# Altium PCB PCB Layout.PcbDoc
Units mm, origin at the board's own origin, x right, y up, seen from the top; angles counter-clockwise.
Board outline 30 x 30 mm, 2 copper layers (Top Layer, Bottom Layer), stack 0.776 mm thick; 23 components, 19 nets, 85 pads, 44 vias.
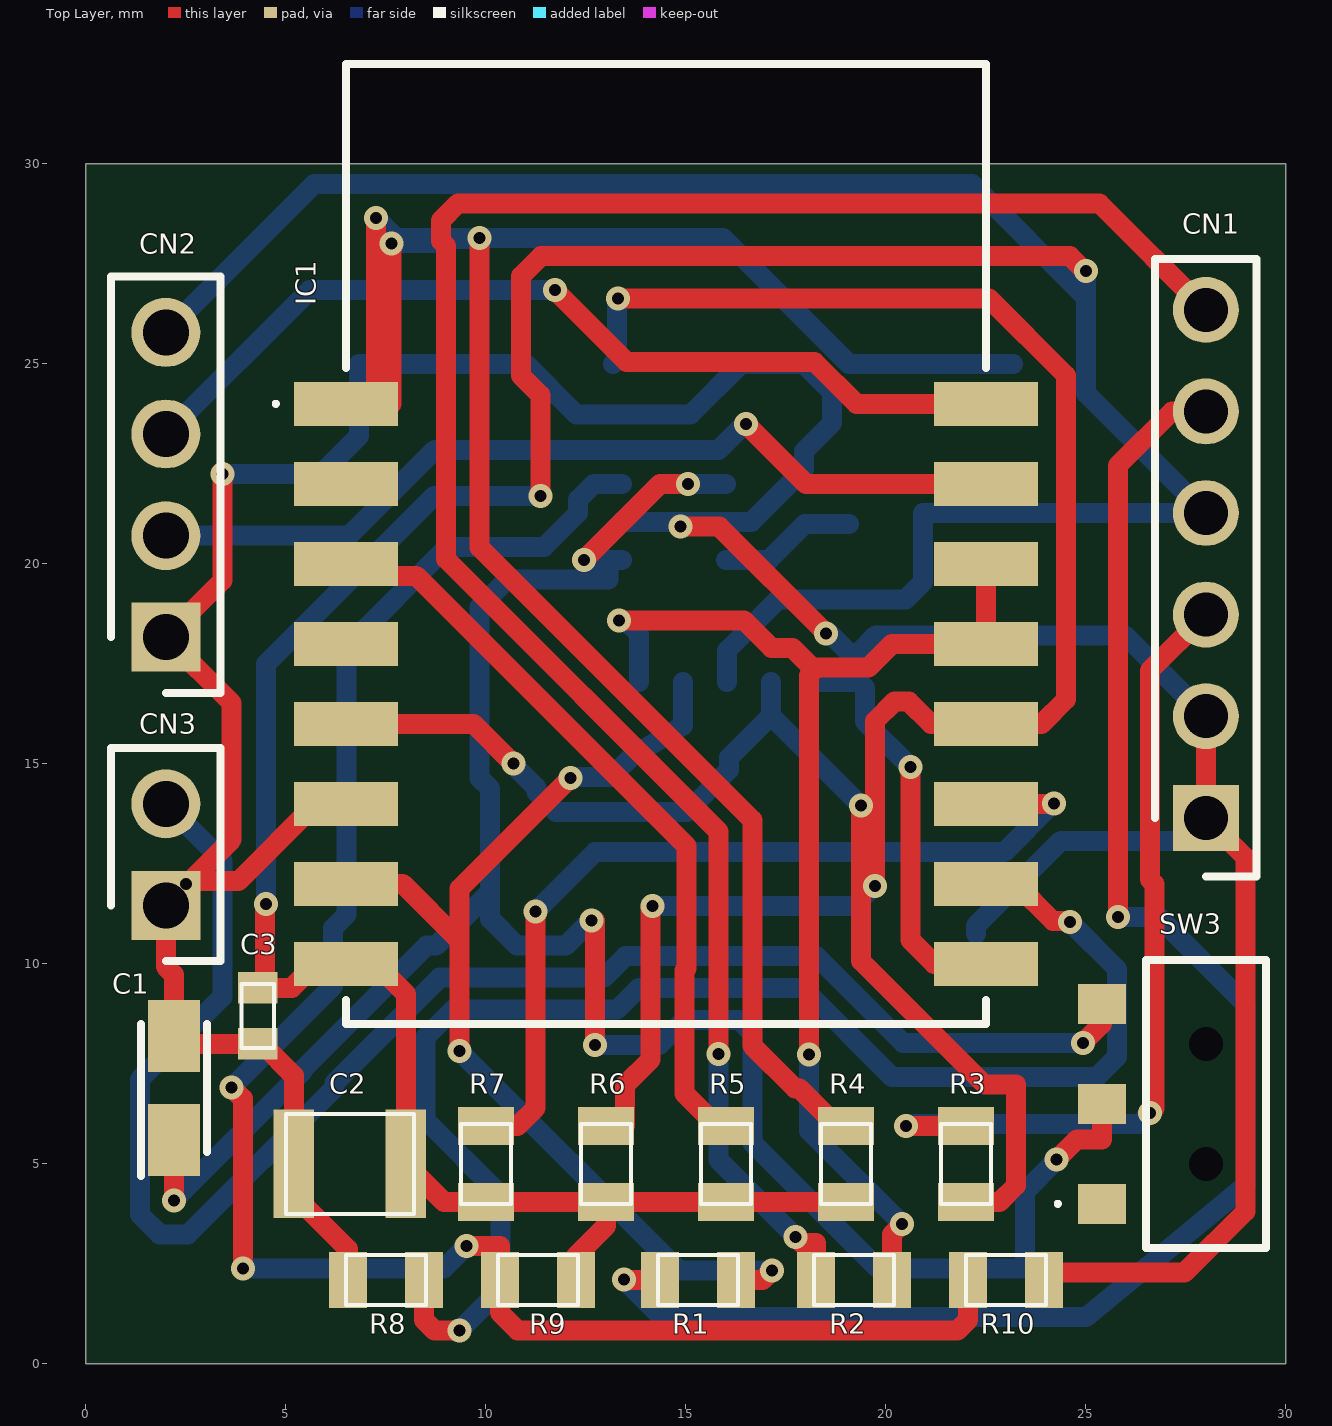
[diagram p0: Top Layer view]
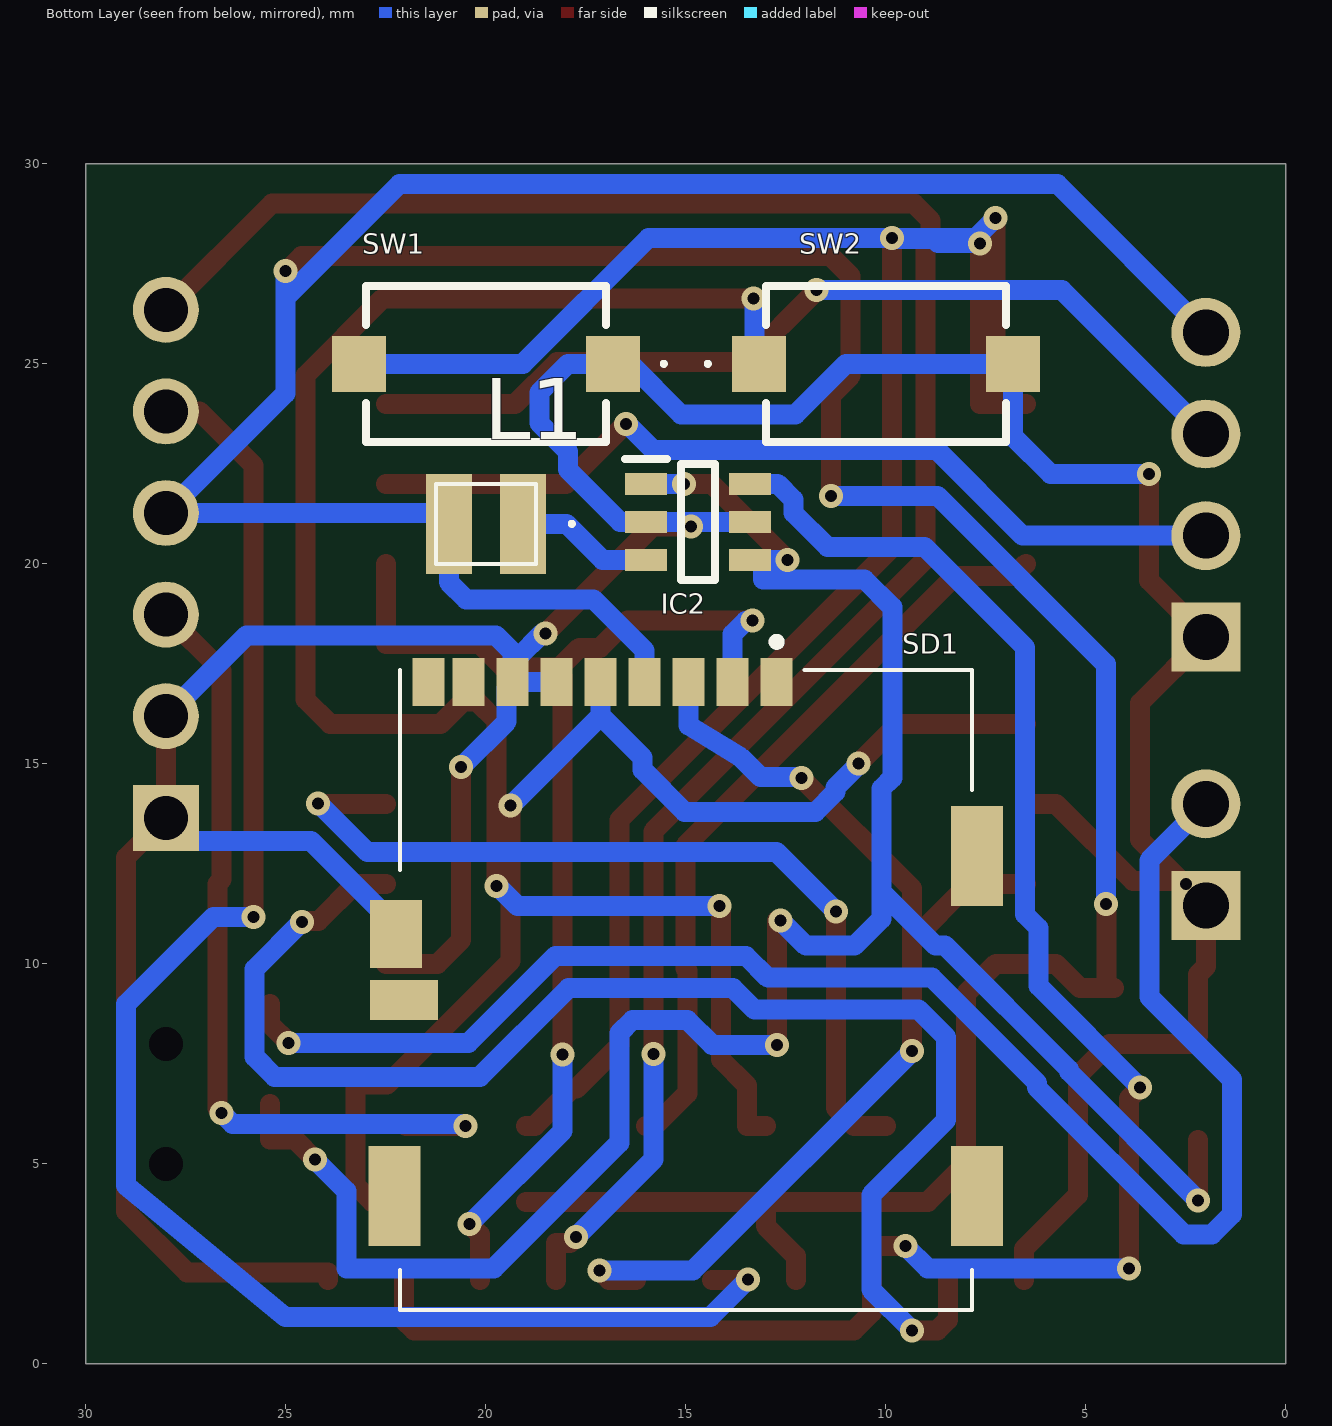
[diagram p1: Bottom Layer view, seen from below]
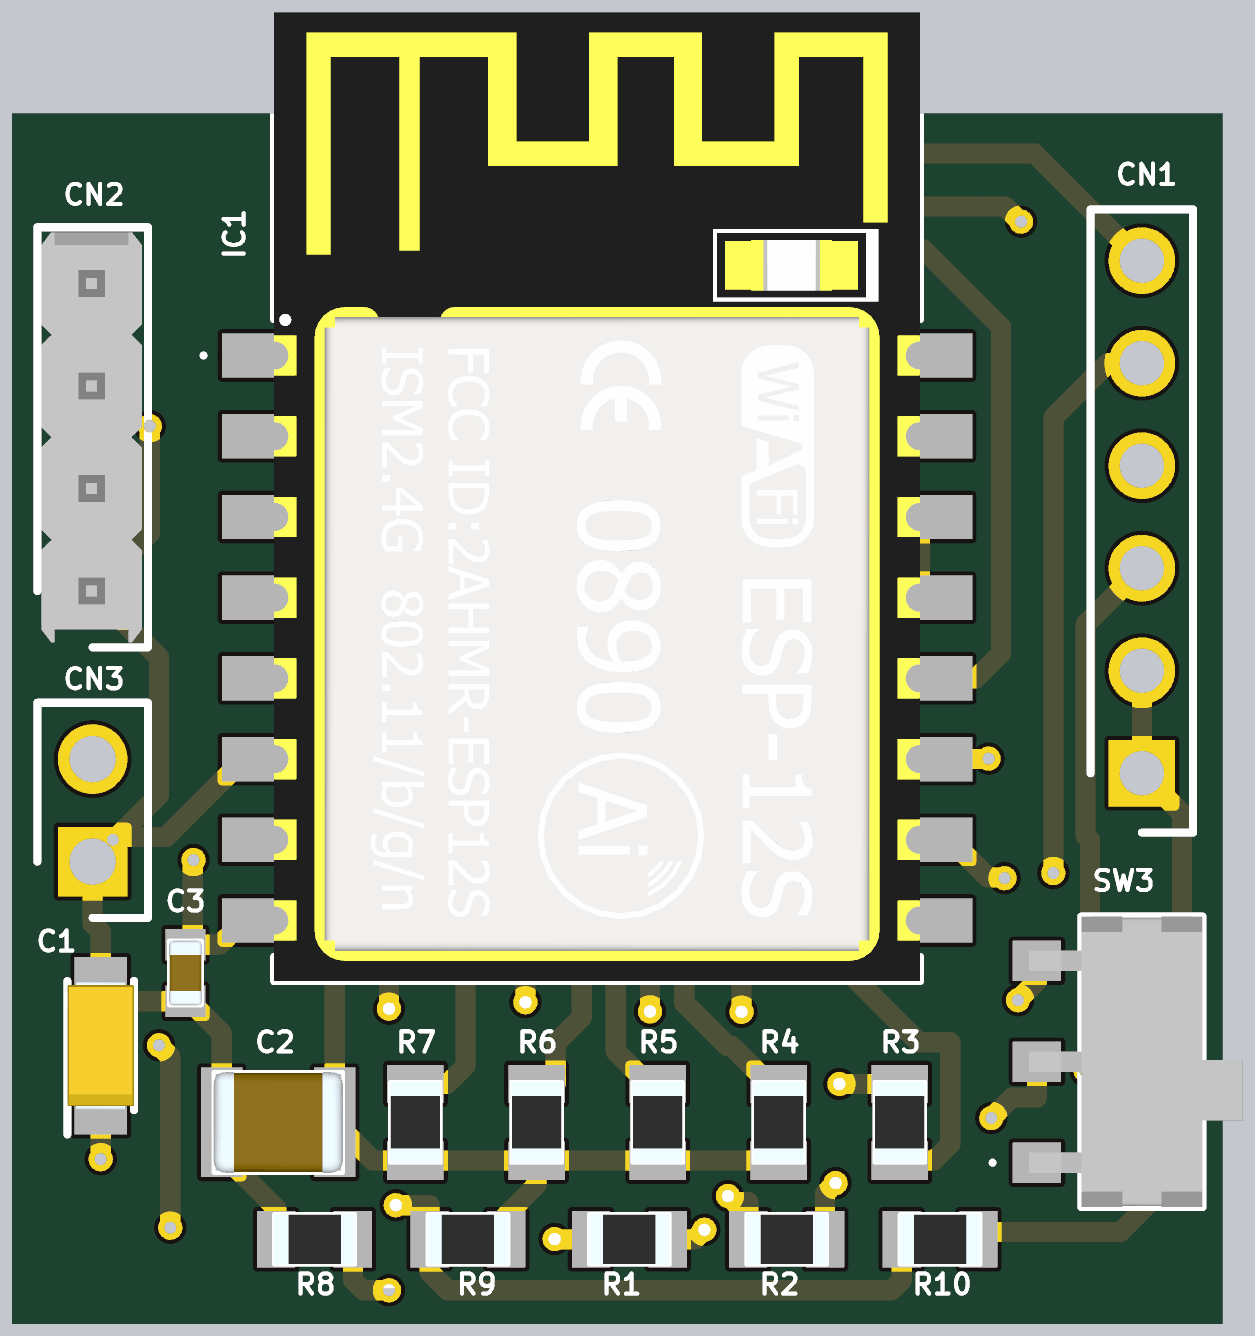
[diagram p2: 3D render of the assembled board from above, using the file's embedded part models]
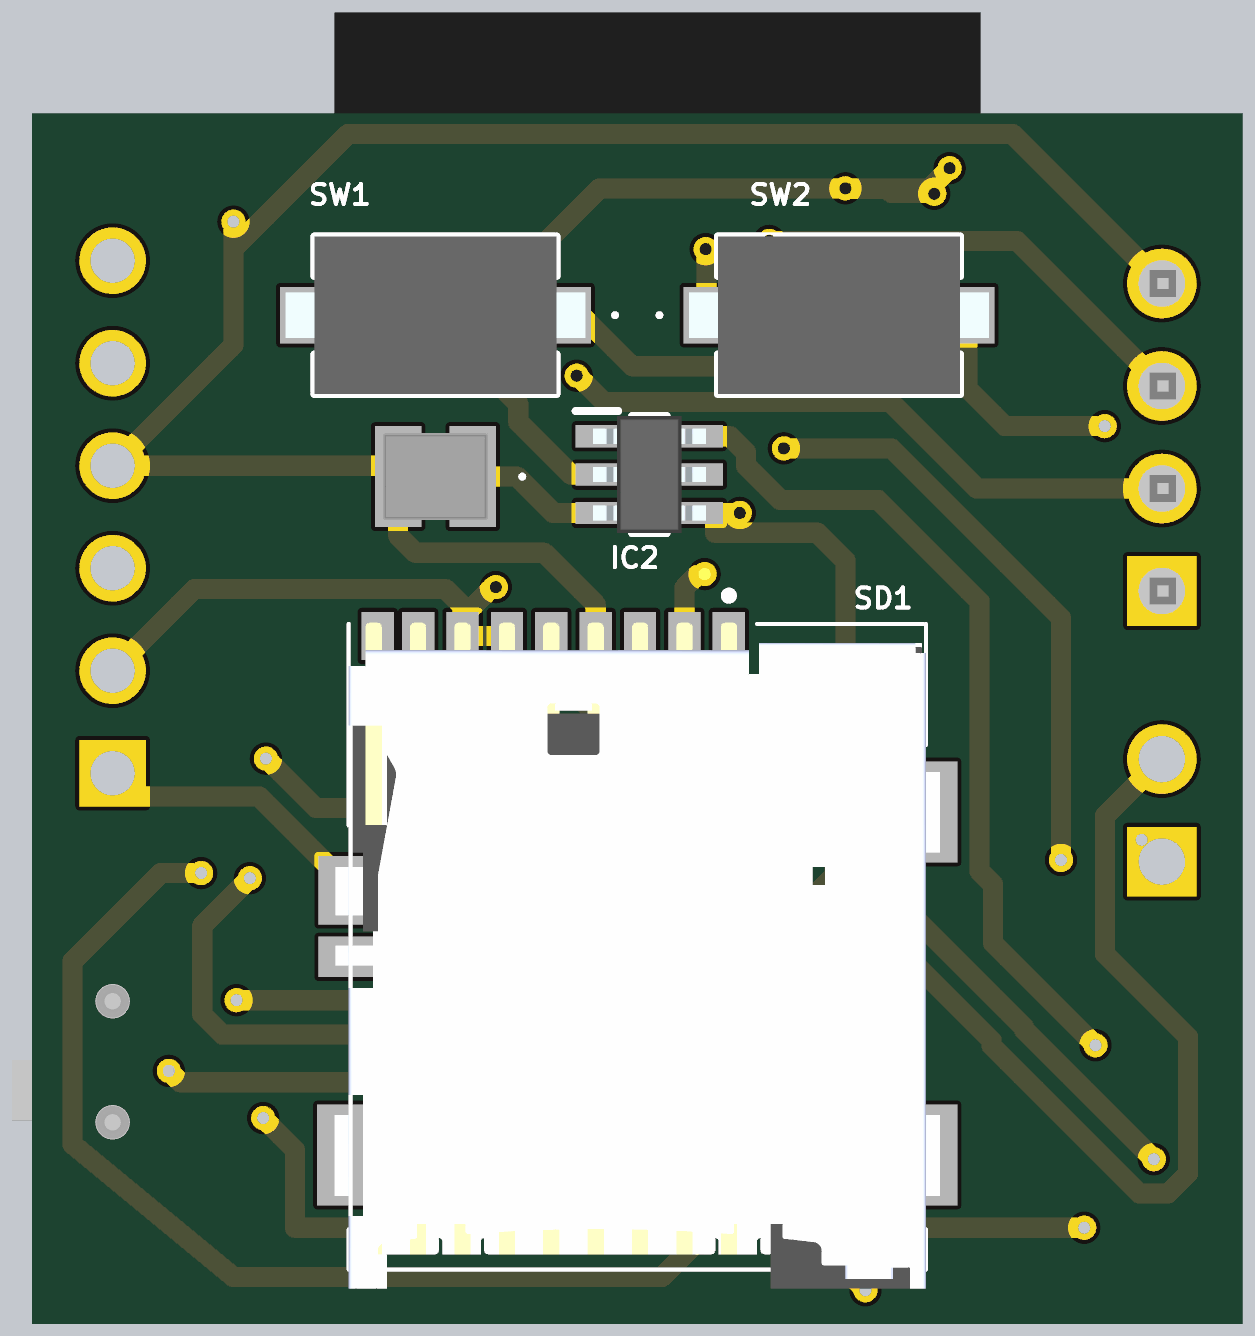
[diagram p3: 3D render of the assembled board from below, using the file's embedded part models]

## Layer stack, top to bottom
Top Solder: solder mask 0.025, Solder Resist, Dk 3.5
Top Layer: signal copper 0.036
Dielectric 1: core 0.704, Core-009, Dk 4.5
Bottom Layer: signal copper 0.036
Bottom Solder: solder mask 0.025, Solder Resist, Dk 3.5

## Board outline
0,0 30,0 30,30 0,30

## Design rules (kind name [scope] priority, off if disabled: settings)
Clearance [All] p1: gap=0.3 ignorepadtopadclearanceinfootprint=FALSE
PolygonConnect [All] p1: connectstyle=Relief reliefconductorwidth=0.254 reliefentries=4 polygonreliefangle="90 Angle" airgapwidth=0.254
RoutingVias [All] p1: holewidth=0.3 width=0.6 viastyle="Through Hole" minholewidth=0.3 minwidth=0.6 maxholewidth=0.3 maxwidth=0.6
SolderMaskExpansion [All] p1: expansion=0.102 istentingtop=FALSE
Width [All] p1: maxlimit=1 minlimit=0.3 preferedwidth=0.5
30 further rules are at their usual default settings.

## Components (designator, comment, footprint, x,y, rotation, side; value= is the part's Value field where it differs from the comment)
C1 "10uF" TPSA106K006R1500 2.2,6.9 r90 top
C2 "47uF" 1210 6.6,5 r0 top
C3 "0.1uF" 0603 4.3,8.7 r90 top
CN1 "Header Male 1x6" 1x6 28,20 r90 top
CN2 "Header Male 1x4" 1x4 2,22 r90 top
CN3 "Header Male 1x2" 1x2 2,12.73 r90 top
IC1 "ESP-12S" ESP-12S 14.5,20.5 r0 top
IC2 "SY8009BABC" SY8009BABC 14.7,21.05 r180 bottom
L1 "SRN2510BTA-2R2M" "2.5 mm x 2 mm x 0.9 mm" 20,21 r0 bottom
R1 "1K" 0805 15.3,2.1 r180 top
R2 "1K" 0805 19.2,2.1 r180 top
R3 "1K" 0805 22,5 r90 top
R4 "10K" 0805 19,5 r90 top
R5 "10K" 0805 16,5 r90 top
R6 "10K" 0805 13,5 r90 top
R7 "10K" 0805 10,5 r90 top
R8 "10K" 0805 7.5,2.1 r0 top
R9 "45.3K" 0805 11.3,2.1 r0 top
R10 "10K" 0805 23,2.1 r180 top
SD1 "045138008100858+" 045138008100858+ 15,9.5 r0 bottom
SW1 "434113025826" 434113025826 20,25 r0 bottom
SW2 "434113025826" 434113025826 10,25 r180 bottom
SW3 "AYZ0102AURLC" AYZ0102AURLC 27.95,6.5 r90 top

## Footprints (in the part's own frame and the unit in brackets; to place one, negate y for a bottom-side part, rotate by r counter-clockwise, add the part's x,y. Pads: shape width x height; smd on the part's side, far side on the other; paste and mask are expansions set on the pad)
1x2 [mm]
  rect 1.725x1.725 hole 1.15: 1(-1.27,0)
  round 1.725 hole 1.15: 2(1.27,0)
  silkscreen extent -2.66,-1.37 2.67,1.37
1x4 [mm]
  rect 1.725x1.725 hole 1.15: 1(-3.835,0)
  round 1.725 hole 1.15: 2(-1.295,0) 3(1.245,0) 4(3.785,0)
  silkscreen extent -5.23,-1.37 5.18,1.37, body extent -5.11,-1.22 5.05,1.27, height 9.59
1x6 [mm]
  rect 1.65x1.65 hole 1.1: 1(-6.35,0)
  round 1.65 hole 1.1: 2(-3.81,0) 3(-1.27,0) 4(1.27,0) 5(3.81,0) 6(6.35,0)
  silkscreen extent -7.82,-1.27 7.62,1.27
"2.5 mm x 2 mm x 0.9 mm" [mm]
  rect 1.15x2.5 smd: 1(-0.925,0) 2(0.925,0)
  silkscreen extent -2.2,-1 1.25,1, body extent -1.3,-1.07 1.3,1.08, height 0.96
0603 [mm]
  rect 0.78x0.99 smd: 1(-0.7,0) 2(0.7,0)
  silkscreen extent -0.8,-0.4 0.8,0.41, body extent -0.8,-0.41 0.8,0.41, height 0.9
0805 [mm]
  rect 0.95x1.4 smd: 1(-0.95,0) 2(0.95,0)
  silkscreen extent -1,-0.63 1,0.63, body extent -1,-0.63 1,0.63, height 0.6
1210 [mm]
  rect 1.02x2.72 smd: 1(-1.4,0) 2(1.4,0)
  silkscreen extent -1.6,-1.25 1.6,1.25, body extent -1.6,-1.25 1.6,1.25, height 2.79
434113025826 [mm]
  rect 1.35x1.4 smd: 1(-3.175,0) 2(3.175,0)
  silkscreen extent -4.5,-1.95 3,1.95, body extent -3.72,-1.95 3.71,1.95, height 2.75
045138008100858+ [mm]
  rect 0.8x1.2 smd: 1(-2.27,-7.55) 2(-1.17,-7.55) 3(-0.07,-7.55) 4(1.03,-7.55) 5(2.13,-7.55) 6(3.23,-7.55) 7(4.33,-7.55) 8(5.43,-7.55) 9(6.43,-7.55)
  rect 1.3x2.5 smd: 10(-7.28,-3.19) 11(-7.28,5.31) 12(7.28,5.31)
  rect 1.3x1.7 smd: 13(7.25,-1.25)
  rect 1.7x1 smd: CD1(7.05,0.4)
  silkscreen extent -7.15,-8.65 7.15,8.15, body extent -7.5,-7.88 7.5,8.62, height 1.65
AYZ0102AURLC [mm]
  rect 1x1.2 smd: 1(-2.5,2.55) 2(0,2.55) 3(2.5,2.55)
  round 0.425 hole 0.85 unplated: MH2(-1.5,-0.05) MH3(1.5,-0.05)
  silkscreen extent -3.6,-1.55 3.6,3.7, body extent -3.6,-2.54 3.6,2.75, height 1.51
ESP-12S [mm]
  rect 2.6x1.1 smd: 1(-8,3.5) 2(-8,1.5) 3(-8,-0.5) 4(-8,-2.5) 5(-8,-4.5) 6(-8,-6.5) 7(-8,-8.5) 8(-8,-10.5) 9(8,-10.5) 10(8,-8.5) 11(8,-6.5) 12(8,-4.5) 13(8,-2.5) 14(8,-0.5) 15(8,1.5) 16(8,3.5)
  silkscreen extent -9.8,-12 8,12, body extent -8,-12 8,12, height 3.11
SY8009BABC [mm]
  rect 1.05x0.55 smd: 1(-1.3,0.95) 2(-1.3,0) 3(-1.3,-0.95) 4(1.3,-0.95) 5(1.3,0) 6(1.3,0.95)
  silkscreen extent -1.82,-1.45 0.42,1.58, body extent -1.4,-1.45 1.4,1.45, height 1
TPSA106K006R1500 [mm]
  rect 1.8x1.3 smd: 1(-1.3,0) 2(1.3,0)
  silkscreen extent -2.2,-0.82 1.6,0.82, body extent -1.6,-0.82 1.6,0.82, height 1.8

## Part data
C1: library part TPSA106K006R1500, "Cap Tant Solid 10uF 6.3V A CASE 10% (3.2 X 1.6 X 1.6mm) SMD 3216-18 1.5 Ohm 125AHA T/R", Manufacturer="Kyocera AVX", Supplier Part Number 1=478-2388-1-ND, Category="Tantalum Capacitors", ComponentLink1Description=https://datasheet.ciiva.com/11793/0900766b80066cb4-11793070.pdf?src-supplier=Rs, ComponentLink1URL=https://datasheet.ciiva.com/11793/0900766b80066cb4-11793070.pdf?src-supplier=Rs, ComponentLink2Description=https://datasheet.ciiva.com/19458/2022203-19458874.pdf?src-supplier=Jameco, ComponentLink2URL=https://datasheet.ciiva.com/19458/2022203-19458874.pdf?src-supplier=Jameco, ComponentLink3Description=https://datasheet.ciiva.com/26341/806582-da-01-en-smd-tantal10uf-6-3v-10-1-500r-2000st-26341833.pdf?src-supplier=Conrad, ComponentLink3URL=https://datasheet.ciiva.com/26341/806582-da-01-en-smd-tantal10uf-6-3v-10-1-500r-2000st-26341833.pdf?src-supplier=Conrad, ComponentLink4Description=https://datasheet.ciiva.com/12883/tps-23028-12883222.pdf?src-supplier=Mouser, ComponentLink4URL=https://datasheet.ciiva.com/12883/tps-23028-12883222.pdf?src-supplier=Mouser, ComponentLink5Description=https://datasheet.ciiva.com/14594/70001047-14594397.pdf?src-supplier=Allied+Electronics, ComponentLink5URL=https://datasheet.ciiva.com/14594/70001047-14594397.pdf?src-supplier=Allied+Electronics, ComponentLink6Description=https://datasheet.ciiva.com/22706/1441576-22706887.pdf?src-supplier=Element14, ComponentLink6URL=https://datasheet.ciiva.com/22706/1441576-22706887.pdf?src-supplier=Element14, ComponentLink7Description=https://datasheet.ciiva.com/7730/1441576-7730861.pdf?src-supplier=Element14, ComponentLink7URL=https://datasheet.ciiva.com/7730/1441576-7730861.pdf?src-supplier=Element14, ComponentLink8Description=https://datasheet.ciiva.com/7730/1680477-7730862.pdf?src-supplier=Element14, ComponentLink8URL=https://datasheet.ciiva.com/7730/1680477-7730862.pdf?src-supplier=Element14, ComponentLink9Description=https://datasheet.ciiva.com/3004/tps-3004580.pdf?src-supplier=Avnet, ComponentLink9URL=https://datasheet.ciiva.com/3004/tps-3004580.pdf?src-supplier=Avnet, ComponentLink10Description=https://datasheet.ciiva.com/263/tps-263896.pdf?src-supplier=Digikey, ComponentLink10URL=https://datasheet.ciiva.com/263/tps-263896.pdf?src-supplier=Digikey, ComponentLink11Description=https://datasheet.ciiva.com/263/tps-263897.pdf?src-supplier=Digikey, ComponentLink11URL=https://datasheet.ciiva.com/263/tps-263897.pdf?src-supplier=Digikey, ComponentLink12Description=https://datasheet.ciiva.com/263/tps-263898.pdf?src-supplier=Digikey, ComponentLink12URL=https://datasheet.ciiva.com/263/tps-263898.pdf?src-supplier=Digikey, ComponentLink13Description=https://datasheet.ciiva.com/16380/tps-16380155.pdf?src-supplier=Future+Electronics, ComponentLink13URL=https://datasheet.ciiva.com/16380/tps-16380155.pdf?src-supplier=Future+Electronics, Life (Hours)=1000Hour, Manufacturer Part Number=TPSA106K006R1500, Pricing 1="1=0.5, 10=0.333, 50=0.2648, 100=0.2187, 500=0.17084, 1000=0.14521 (USD)", RoHS=Yes, Stock 1=29007, Supplier 1=Digikey
C2: library part 12103D476MAT2A, "Ceramic Capacitor, Multilayer, Ceramic, 25V, 20% +Tol, 20% -Tol, X5R, 15% TC, 47uF, Surface Mount, 1210", Case/Package=351Case, Dielectric=1537DielectricType, Manufacturer="Kyocera AVX", Max Operating Temperature=85°C, Min Operating Temperature=-55°C, Supplier Part Number 1=581-12103D476MAT2A, Tolerance=20%, Voltage Rating=25V, Capacitance=47uF, Category="Ceramic Capacitors", Height=2.79mm, Manufacturer Part Number=12103D476MAT2A, Material=4241ConductorMaterial, Pricing 1="1=2.75, 10=2.12, 50=1.94, 100=1.61, 1000=1.09, 10000=1.04 (USD)", RoHS=Yes, RoHS Compliant=Yes, Stock 1=27598, Supplier 1=Mouser, Voltage Rating (DC)=25V
C3: library part 06035C104K4T4A, "Multilayer Ceramic Capacitor, 0.1 uF, 50 V, ± 10%, X7R, 0603 [1608 Metric]", Capacitance=100nF, Case Code (Imperial)=0603, Case Code (Metric)=1608, Manufacturer="Kyocera AVX", Max Operating Temperature=125°C, Min Operating Temperature=-55°C, Package Quantity=10000, Ratings=AEC-Q200, Supplier Part Number 1=478-KAM15AR71H104KMCT-ND, Tolerance=10%, Voltage Rating=50V, Case/Package=0603, Category="Ceramic Capacitors", ComponentLink1Description=https://datasheet.ciiva.com/13197/cx7r-13197961.pdf?src-supplier=Mouser, ComponentLink1URL=https://datasheet.ciiva.com/13197/cx7r-13197961.pdf?src-supplier=Mouser, Lead Free=5697LeadFree, Length=0.063inch, Manufacturer Part Number=06035C104K4T4A, Mount="Surface Mount", Packaging="Tape and Reel", Pricing 1="1=0.1, 10=0.065, 50=0.037, 100=0.0287, 500=0.02164, 1000=0.017, 2500=0.01545, 5000=0.01421 (USD)", RoHS=Yes, RoHS Compliant=Yes, Series=-, Stock 1=15963, Supplier 1=Digikey, Termination=SMD/SMT, Thickness=0.035inch, Voltage Rating (DC)=50V, Width=0.032inch
CN1: "1x6"
CN2: "1x4"
CN3: "1x2"
IC1: "Wifi Module, 2.484Ghz, 9 I/o Port Rohs Compliant: Yes", Current - Transmitting=71mA, Frequency=2.484GHz, Manufacturer="RF Solutions", Max Operating Temperature=85°C, Max Supply Voltage=3.6V, Min Operating Temperature=-20°C, Min Supply Voltage=3V, Nominal Supply Current=300mA, Supplier Part Number 1=ESP-12SRF-ND, Bandwidth=72MHz, Category="RF Receivers, Transceivers", ComponentLink1Description=http://www.farnell.com/datasheets/2575856.pdf?src-supplier=Farnell, ComponentLink1URL=http://www.farnell.com/datasheets/2575856.pdf?src-supplier=Farnell, ComponentLink2Description=https://www.rfsolutions.co.uk/downloads/1513856197DS-ESP-12S.pdf?src-supplier=Digikey, ComponentLink2URL=https://www.rfsolutions.co.uk/downloads/1513856197DS-ESP-12S.pdf?src-supplier=Digikey, Data Rate=54Mbps, Interface=I2C,SPI,UART, Manufacturer Part Number=ESP-12S, Max Frequency=2.484GHz, Number of GPIO=9NUMBER, Pricing 1="1=10.3, 10=9.444, 25=8.5848, 100=7.7265, 250=7.08264, 500=6.43876, 1000=5.79488 (USD)", Reach SVHC Compliant=4186SVHC, RoHS=No, Sensitivity=-90dBm, Stock 1=59, Supplier 1=Digikey
IC2: "Step-down type SOT-23-6 DC-DC Converters ROHS"
L1: "Power Inductors - SMD Ind,2x2.5x0.9mm,2.2uH+/-20%,2A,shd", Manufacturer=Bourns, Supplier Part Number 1=118-SRN2510BTA-2R2MTR-ND, Manufacturer Part Number=SRN2510BTA-2R2M, Pricing 1="3000=0.15675 (USD)", RoHS=No, Supplier 1=DigiKey
R1 R2 R3: library part RC0805FR-071KL, "SMD Chip Resistor, 1 kOhm, ± 1%, 125 mW, 0805 [2012 Metric], Thick Film, General Purpose", Case Code (Imperial)=0805, Case Code (Metric)=2012, Manufacturer=Yageo, Max Operating Temperature=155°C, Max Power Dissipation=125mW, Min Operating Temperature=-55°C, Package Quantity=1, Resistance=1kR, Resistance Tolerance=1%, Resistor Type="Thick Film", Supplier Part Number 1=311-1.00KCRCT-ND, Temperature Coefficient=100ppm/°C, Voltage Rating=150V, Case/Package=0805, Category="Chip SMD Resistors", ComponentLink1Description=https://datasheet.ciiva.com/7941/1686128-7941719.pdf?src-supplier=Element14, ComponentLink1URL=https://datasheet.ciiva.com/7941/1686128-7941719.pdf?src-supplier=Element14, ComponentLink2Description=https://datasheet.ciiva.com/46385/444164-46385020.pdf?src-supplier=Element14, ComponentLink2URL=https://datasheet.ciiva.com/46385/444164-46385020.pdf?src-supplier=Element14, ComponentLink3Description=https://datasheet.ciiva.com/2456/pyu-r-int-thick-7-2456976.pdf?src-supplier=Digikey, ComponentLink3URL=https://datasheet.ciiva.com/2456/pyu-r-int-thick-7-2456976.pdf?src-supplier=Digikey, ComponentLink4Description=https://datasheet.ciiva.com/2456/pyu-r-int-thick-7-2456977.pdf?src-supplier=Digikey, ComponentLink4URL=https://datasheet.ciiva.com/2456/pyu-r-int-thick-7-2456977.pdf?src-supplier=Digikey, ComponentLink5Description=https://datasheet.ciiva.com/2456/pyu-r-int-thick-7-2456975.pdf?src-supplier=Digikey, ComponentLink5URL=https://datasheet.ciiva.com/2456/pyu-r-int-thick-7-2456975.pdf?src-supplier=Digikey, ComponentLink6Description=https://datasheet.ciiva.com/16850/rc0805-16850409.pdf?src-supplier=Future+Electronics, ComponentLink6URL=https://datasheet.ciiva.com/16850/rc0805-16850409.pdf?src-supplier=Future+Electronics, Construction=Rectangular, Depth=1.25mm, Features="Moisture Resistant", Height=0.024inch, Lead Free=5697LeadFree, Length=0.079inch, Manufacturer Part Number=RC0805FR-071KL, Military Standard=Not, Number of Pins=2, Number of Terminations=2, Packaging="Tape and Reel", Power Rating=125mW, Pricing 1="1=0.1, 10=0.025, 50=0.016, 100=0.0133, 500=0.00912, 1000=0.00787 (USD)", Reach SVHC Compliant=No, RoHS=Yes, RoHS Compliant=Yes, Series=RC, Size Code=0805, Stock 1=2558661, Supplier 1=Digikey, Termination=SMD/SMT, Tolerance=1%, Voltage Rating (AC)=150V, Voltage Rating (DC)=150V, Width=0.049inch
R4 R5 R6 R7 R8 R10: library part ERJUP6D1002V, "Anti-Sulfurated Thick Film Chip Resistors/ Anti-Surge Type, 10000½, 0.5%, 0.5W", Manufacturer=Panasonic, Supplier Part Number 1=3599201, ComponentLink1Description=http://datasheet.octopart.com/ERJUP6D1002V-Panasonic-datasheet-102570939.pdf?src-supplier=Newark, ComponentLink1URL=http://datasheet.octopart.com/ERJUP6D1002V-Panasonic-datasheet-102570939.pdf?src-supplier=Newark, ComponentLink2Description=http://datasheet.octopart.com/ERJUP6D1002V-Panasonic-datasheet-102570939.pdf?src-supplier=Farnell, ComponentLink2URL=http://datasheet.octopart.com/ERJUP6D1002V-Panasonic-datasheet-102570939.pdf?src-supplier=Farnell, Manufacturer Part Number=ERJUP6D1002V, Pricing 1="10=0.0972, 100=0.0701, 500=0.0583, 1000=0.0564, 2500=0.0517, 5000=0.0443, 25000=0.0413, 50000=0.0395 (EUR)", RoHS=No, Stock 1=2750, Supplier 1=Farnell
R9: library part RT0805DRE0745K3L, "High Precision-High Stability Chip Resistor Thin Film 0805 45.3kOhm 0.5% Paper T/R", Case/Package=0805, Manufacturer=Yageo, Max Operating Temperature=155°C, Max Power Dissipation=125mW, Min Operating Temperature=-55°C, Resistance=45.3kR, Supplier Part Number 1=13-RT0805DRE0745K3LCT-ND, Temperature Coefficient=50ppm/°C, Tolerance=0.5%, Voltage Rating (DC)=150V, Category="Chip SMD Resistors", ComponentLink1Description=https://datasheet.ciiva.com/2569/pyu-rt-1-to-0-05-rohs-l-5-2569500.pdf?src-supplier=Digikey, ComponentLink1URL=https://datasheet.ciiva.com/2569/pyu-rt-1-to-0-05-rohs-l-5-2569500.pdf?src-supplier=Digikey, Lead Free="Lead Free", Manufacturer Part Number=RT0805DRE0745K3L, Number of Terminations=2, Packaging="Tape and Reel", Pricing 1="1=0.1, 10=0.047, 50=0.0392, 100=0.0357, 500=0.02826, 1000=0.02534 (USD)", RoHS=Yes, RoHS Compliant=Yes, Series=RT, Stock 1=5000, Supplier 1=DigiKey
SD1: "T&r/Memory Card Rohs Compliant: Yes", Manufacturer=AVX, Supplier Part Number 1=581-045138008100858+, Category="Memory Connectors", ComponentLink1Description=https://datasheet.ciiva.com/6927/1631394-6927204.pdf?src-supplier=Newark, ComponentLink1URL=https://datasheet.ciiva.com/6927/1631394-6927204.pdf?src-supplier=Newark, Manufacturer Part Number=045138008100858+, Pricing 1="1=3.15, 10=2.87, 50=2.87, 100=2.53, 1000=2.27, 10000=2.27 (USD)", RoHS=Yes, Stock 1=26919, Supplier 1=Mouser
SW1 SW2: "Switch Tactile Spst-no 0.05A 12V", Manufacturer="Wurth Electronics", Supplier Part Number 1=732-7042-1-ND, Category="Tactile Switches", ComponentLink1Description=https://datasheet.ciiva.com/30466/0900766b8126b62d-30466725.pdf?src-supplier=Rs, ComponentLink1URL=https://datasheet.ciiva.com/30466/0900766b8126b62d-30466725.pdf?src-supplier=Rs, ComponentLink2Description=https://datasheet.ciiva.com/1701/434123025816-1701904.pdf?src-supplier=Newark, ComponentLink2URL=https://datasheet.ciiva.com/1701/434123025816-1701904.pdf?src-supplier=Newark, ComponentLink3Description=https://datasheet.ciiva.com/29123/711750-da-01-en-taster-434113025826-29123817.pdf?src-supplier=Conrad, ComponentLink3URL=https://datasheet.ciiva.com/29123/711750-da-01-en-taster-434113025826-29123817.pdf?src-supplier=Conrad, ComponentLink4Description=https://datasheet.ciiva.com/1532/434123025816-1532520.pdf?src-supplier=Element14, ComponentLink4URL=https://datasheet.ciiva.com/1532/434123025816-1532520.pdf?src-supplier=Element14, ComponentLink5Description=https://datasheet.ciiva.com/1633/434123025816-1633927.pdf?src-supplier=Farnell, ComponentLink5URL=https://datasheet.ciiva.com/1633/434123025816-1633927.pdf?src-supplier=Farnell, Manufacturer Part Number=434113025826, Pricing 1="1=0.58, 1500=0.461 (USD)", RoHS=Yes, Stock 1=4844, Supplier 1=Digikey
SW3: "AYZ Series 100 mA 12 V SPDT On-On Surface Mount Side Actuated Slide Switch", Manufacturer="ITT C&K", Supplier Part Number 1=2624403, Category=Uncategorized, Manufacturer Part Number=AYZ0102AURLC, Pricing 1="2=0.865, 10=0.83, 100=0.765, 500=0.635, 1000=0.59 (GBP)", RoHS=No, Stock 1=2968, Supplier 1=Rs

## Via types
v1: diameter 0.6, hole 0.3, Top Layer to Bottom Layer, 44 vias

## Nets (pads, with @x,y where several pads share a name; then routed paths per layer and width w, separated by ;. In a path a pad name is that pad's centre, name@x,y a point inside that pad or via, vN(x,y) a via of type N, cw(c..) or ccw(c..) an arc to the next point about the centre after c; other vN are vias at no path point)
+3V3: C2.2 C3.2 CN1.4 CN2.4 IC1.8 L1.2 R4.1 R5.1 R6.1 R7.1 R9.2 SD1.4 | length 108.1
  Top Layer w0.5: v1(4.5,11.5) 4.481,11.481 4.481,9.54 4.341,9.4 C3.2 5.15,9.4 5.75,10 IC1.8@7.25,10 ; IC1.8 IC1.8@7.25,10 ; v1(11.366,21.7) 11.366,24.216 10.88,24.703 10.88,27.192 11.378,27.69 24.607,27.69 24.979,27.317 v1(25.006,27.317) ; R9.2 12.25,2.692 13,3.442 R6.1 ; R4.1 R5.1 R6.1 ; IC1.8@7.25,10 8,9.25 C2.2 8.95,4.05 R7.1 R6.1
  Bottom Layer w0.5: CN2.4 5.708,29.493 22.158,29.493 25.006,26.644 ; v1(4.5,11.5) 4.5,17.492 8.708,21.7 v1(11.366,21.7) ; SD1.4 16.03,17.832 17.31,19.112 20.497,19.112 20.925,19.541 L1.2 20.925,21.27 CN1.4 25.006,24.264 25.006,26.644 ; v1(25.006,27.317) 25.006,26.644
GND: C1.2 C2.1 C3.1 CN1.1 CN1.2 CN2.1 CN3.1 IC1.6 IC1.9 IC2.2 IC2.5 R8.1 R10.1 SD1.6 SD1.7 SD1.13 SW1.1 SW2.2 | length 108.4
  Top Layer w0.5: v1(2.5,12) 2.573,12.073 3.823,12.073 5.75,14 IC1.6 ; v1(3.416,22.25) 3.416,19.581 CN2.1 3.645,16.52 3.645,13.105 2.52,11.98 CN3.1 2,9.928 2.2,9.728 C1.2 2.4,8 4.405,8 5.2,7.205 C2.1 5.2,4.22 6.55,2.87 R8.1 ; v1(14.872,20.929) 15.837,20.929 v1(18.504,18.262) ; v1(20.62,14.915) 20.62,10.59 21.21,10 IC1.9 ; R10.1 23.95,2.286 27.47,2.286 28.994,3.81 28.994,12.656 CN1.1 CN1.2
  Bottom Layer w0.5: v1(3.416,22.25) 5.885,22.25 6.825,23.19 SW2.2 10.998,25 12.263,23.735 15.119,23.735 16.384,25 SW1.1 17.945,25 18.656,24.289 18.656,23.515 17.95,22.809 17.95,22.357 16.643,21.05 IC2.2 v1@14.872,21.05 ; IC2.5 v1@14.872,21.05 ; v1(14.872,20.929) v1@14.872,21.05 ; SD1.6 SD1.7 ; v1(18.504,18.262) 18.593,18.262 19.196,17.659 SD1.7@19.33,17.525 ; v1(20.62,14.915) 19.48,16.055 19.48,16.9 SD1.7 ; SD1.13 22.25,10.95 24.375,13.075 27.425,13.075 CN1.1 ; CN1.2 25.978,18.212 19.749,18.212 19.33,17.792 SD1.7@19.33,17.525 ; SD1.7 SD1.7@19.33,17.525
NetCN1_3: CN1.3 R3.2 | length 20.9
  Top Layer w0.5: v1(20.504,5.95) R3.2 ; v1(26.606,6.274) 26.712,6.379 26.712,11.997 26.606,12.102 26.606,17.336 CN1.3
  Bottom Layer w0.5: v1(20.504,5.95) 20.548,5.994 26.327,5.994 v1(26.606,6.274)
NetCN1_5: CN1.5 R1.2 | length 40.7
  Top Layer w0.5: v1(13.449,2.108) 13.457,2.1 R1.2 ; v1(25.806,11.176) 25.806,22.464 27.152,23.81 CN1.5
  Bottom Layer w0.5: v1(13.449,2.108) 14.389,1.168 25.006,1.168 28.994,4.457 28.994,8.991 26.81,11.176 v1(25.806,11.176)
NetCN1_6: CN1.6 R2.2 | length 51
  Top Layer w0.5: v1(15.811,7.747) 15.811,13.314 9.004,20.121 9.004,27.948 8.882,28.07 8.882,28.587 9.301,29.007 25.343,29.007 CN1.6 ; v1(17.742,3.175) 17.894,3.022 18.25,3.022 R2.2
  Bottom Layer w0.5: v1(15.811,7.747) 15.811,5.105 v1(17.742,3.175)
NetCN2_2: CN2.2 IC1.15 | length 22.3
  Top Layer w0.5: v1(16.5,23.5) 18,22 IC1.15
  Bottom Layer w0.5: CN2.2 6.581,20.705 8.727,22.85 15.823,22.85 16.473,23.5 v1(16.5,23.5)
NetCN2_3: CN2.3 IC1.16 | length 23.2
  Top Layer w0.5: v1(11.73,26.84) 13.522,25.048 18.219,25.048 19.267,24 IC1.16
  Bottom Layer w0.5: CN2.3 5.595,26.84 v1(11.73,26.84)
NetCN3_2: CN3.2 SW3.3 | length 40.5
  Top Layer w0.5: v1(24.93,8.026) 25.4,8.496 SW3.3
  Bottom Layer w0.5: CN3.2 3.412,12.588 3.412,9.173 1.35,7.111 1.35,3.734 1.848,3.236 2.552,3.236 6.22,6.904 6.22,7.026 8.847,9.653 12.951,9.653 13.495,10.197 18.261,10.197 20.432,8.026 v1(24.93,8.026)
NetIC1_1: IC1.1 R4.2 SW1.2 | length 55.7
  Top Layer w0.5: IC1.1 IC1.1@7.26,24 ; v1(7.26,28.643) IC1.1@7.26,24 ; v1(7.641,28.008) 7.641,24 IC1.1@7.26,24 ; v1(9.842,28.143) 9.842,20.414 16.661,13.595 16.661,7.955 17.728,6.889 17.836,6.889 18.775,5.95 R4.2
  Bottom Layer w0.5: v1(7.26,28.643) 7.76,28.143 8.792,28.143 v1(9.842,28.143) ; v1(7.641,28.008) 7.657,28.025 8.691,28.025 8.792,28.126 9.813,28.126 9.842,28.097 9.889,28.143 15.933,28.143 19.076,25 SW1.2
NetIC1_3: IC1.3 R5.2 | length 19
  Top Layer w0.5: IC1.3 6.8,19.7 8.261,19.7 15.011,12.949 15.011,9.881 14.961,9.832 14.961,6.764 15.775,5.95 R5.2
NetIC1_5: IC1.5 R3.1 SD1.5 | length 29.8
  Top Layer w0.5: IC1.5 9.692,16 v1(10.689,15.003) ; v1(19.38,13.955) 19.38,10.071 22.466,6.985 23.254,6.985 23.254,4.457 22.846,4.05 R3.1
  Bottom Layer w0.5: v1(10.689,15.003) 10.689,14.976 11.261,14.404 11.261,14.296 11.759,13.798 15.028,13.798 16.079,14.849 16.079,15.154 17.13,16.205 ; SD1.5 17.13,16.205 ; v1(19.38,13.955) 17.13,16.205
NetIC1_7: IC1.7 R1.1 SD1.3 | length 26.8
  Top Layer w0.5: IC1.7 7.92,12 9.342,10.578 ; v1(9.342,7.815) 9.342,10.578 ; v1(12.111,14.648) 9.342,11.879 9.342,10.578 ; R1.1 16.921,2.1 v1(17.158,2.337)
  Bottom Layer w0.5: v1(9.342,7.815) 14.821,2.337 v1(17.158,2.337) ; v1(12.111,14.648) 12.13,14.667 13.13,14.667 13.627,15.164 14.93,15.959 SD1.3
NetIC1_10: IC1.10 R8.2 | length 35.8
  Top Layer w0.5: R8.2 8.45,1.1 8.712,0.838 v1(9.345,0.838) ; IC1.10 23.25,12 24.182,11.069 24.58,11.069 v1(24.599,11.049)
  Bottom Layer w0.5: v1(9.345,0.838) 10.362,1.855 10.362,4.226 8.492,6.095 8.492,8.167 9.178,8.853 13.282,8.853 13.826,9.397 17.93,9.397 20.151,7.176 25.282,7.176 25.78,7.674 25.78,9.869 v1(24.599,11.049)
NetIC1_11: IC1.11 R7.2 | length 22.1
  Top Layer w0.5: R7.2 10.797,5.95 11.239,6.392 v1(11.239,11.303) ; IC1.11 24.189,14 v1(24.202,14.013)
  Bottom Layer w0.5: v1(11.239,11.303) 12.728,12.791 22.96,12.791 24.181,14.013 v1(24.202,14.013)
NetIC1_12: IC1.12 R6.2 SW2.1 | length 43.4
  Top Layer w0.5: R6.2 13.474,5.95 13.474,6.961 14.121,7.608 14.121,11.402 v1(14.161,11.441) ; v1(13.305,26.636) 22.576,26.636 24.506,24.706 24.506,16.61 23.897,16 IC1.12 21.128,16 20.575,16.553 20.214,16.553 19.731,16.07 v1(19.731,11.941)
  Bottom Layer w0.5: SW2.1 13.286,25.111 13.286,26.617 v1(13.305,26.636) ; v1(14.161,11.441) 19.204,11.441 19.704,11.941 v1(19.731,11.941)
NetIC1_13: IC1.13 IC1.14 R2.1 SD1.2 | length 30.1
  Top Layer w0.5: v1(13.33,18.585) 16.46,18.585 17.144,17.901 17.664,17.901 18.152,17.412 ; v1(18.08,7.739) 18.08,17.213 18.279,17.412 19.571,17.412 20.159,18 IC1.13 IC1.14 ; R2.1 20.15,3.235 v1(20.409,3.493)
  Bottom Layer w0.5: v1(13.33,18.585) 13.349,18.565 13.51,18.565 13.83,18.246 SD1.2 ; v1(18.08,7.739) 18.08,5.822 v1(20.409,3.493)
NetIC2_3: IC2.3 L1.1 | length 3.4
  Bottom Layer w0.5: IC2.3 17.081,20.1 17.981,21 L1.1
NetIC2_6: IC2.6 R9.1 R10.2 | length 46.9
  Top Layer w0.5: v1(3.645,6.909) 3.924,6.629 v1(3.924,2.387) ; v1(9.512,2.946) 10.35,2.946 R9.1 10.35,1.282 10.794,0.838 21.796,0.838 22.05,1.092 R10.2
  Bottom Layer w0.5: v1(3.645,6.909) 6.185,9.449 6.185,10.896 6.52,11.232 6.52,17.912 9.03,20.421 11.455,20.421 12.306,21.272 12.306,21.602 12.704,22 IC2.6 ; v1(3.924,2.387) 8.953,2.387 v1(9.512,2.946)
VCC: C1.1 IC2.1 IC2.4 SW3.2 | length 56.6
  Top Layer w0.5: v1(2.2,4.086) C1.1 ; v1(12.459,20.1) 14.359,22 v1(15.049,22) ; v1(12.636,11.088) 12.724,11.088 v1(12.724,7.975) ; v1(24.27,5.105) 24.778,5.613 25.4,5.613 SW3.2
  Bottom Layer w0.5: v1(2.2,4.086) 5.42,7.306 5.42,7.358 8.515,10.453 8.758,10.453 10.109,11.804 ; v1(12.459,20.1) IC2.4@13.071,20.1 ; v1(12.636,11.088) 12.001,10.453 10.781,10.453 10.109,11.125 10.109,11.804 ; v1(12.724,7.975) 14.34,7.975 14.961,8.597 16.332,8.597 16.661,8.267 16.661,5.525 19.799,2.387 23.482,2.387 23.482,4.318 v1(24.27,5.105) ; IC2.4 IC2.4@13.071,20.1 ; v1(15.049,22) IC2.1 ; 10.109,11.804 10.109,14.381 9.839,14.651 9.839,18.914 10.533,19.609 12.459,19.609 13.071,19.609 IC2.4@13.071,20.1
pads on no net: IC1.2 IC1.4 SD1.1 SD1.8 SD1.9 SD1.10 SD1.11 SD1.12 SD1.CD1 SW3.1 SW3.MH2 SW3.MH3